# Altium PCB SmartSocket V1.0.PcbDoc (part 4 of 4)
Units mm, origin at the board's own origin, x right, y up, seen from the top; angles counter-clockwise.
Board outline 49.2 x 69.88 mm, 2 copper layers (Top Layer, Bottom Layer), stack 1.671 mm thick; 117 components, 80 nets, 371 pads, 48 vias.
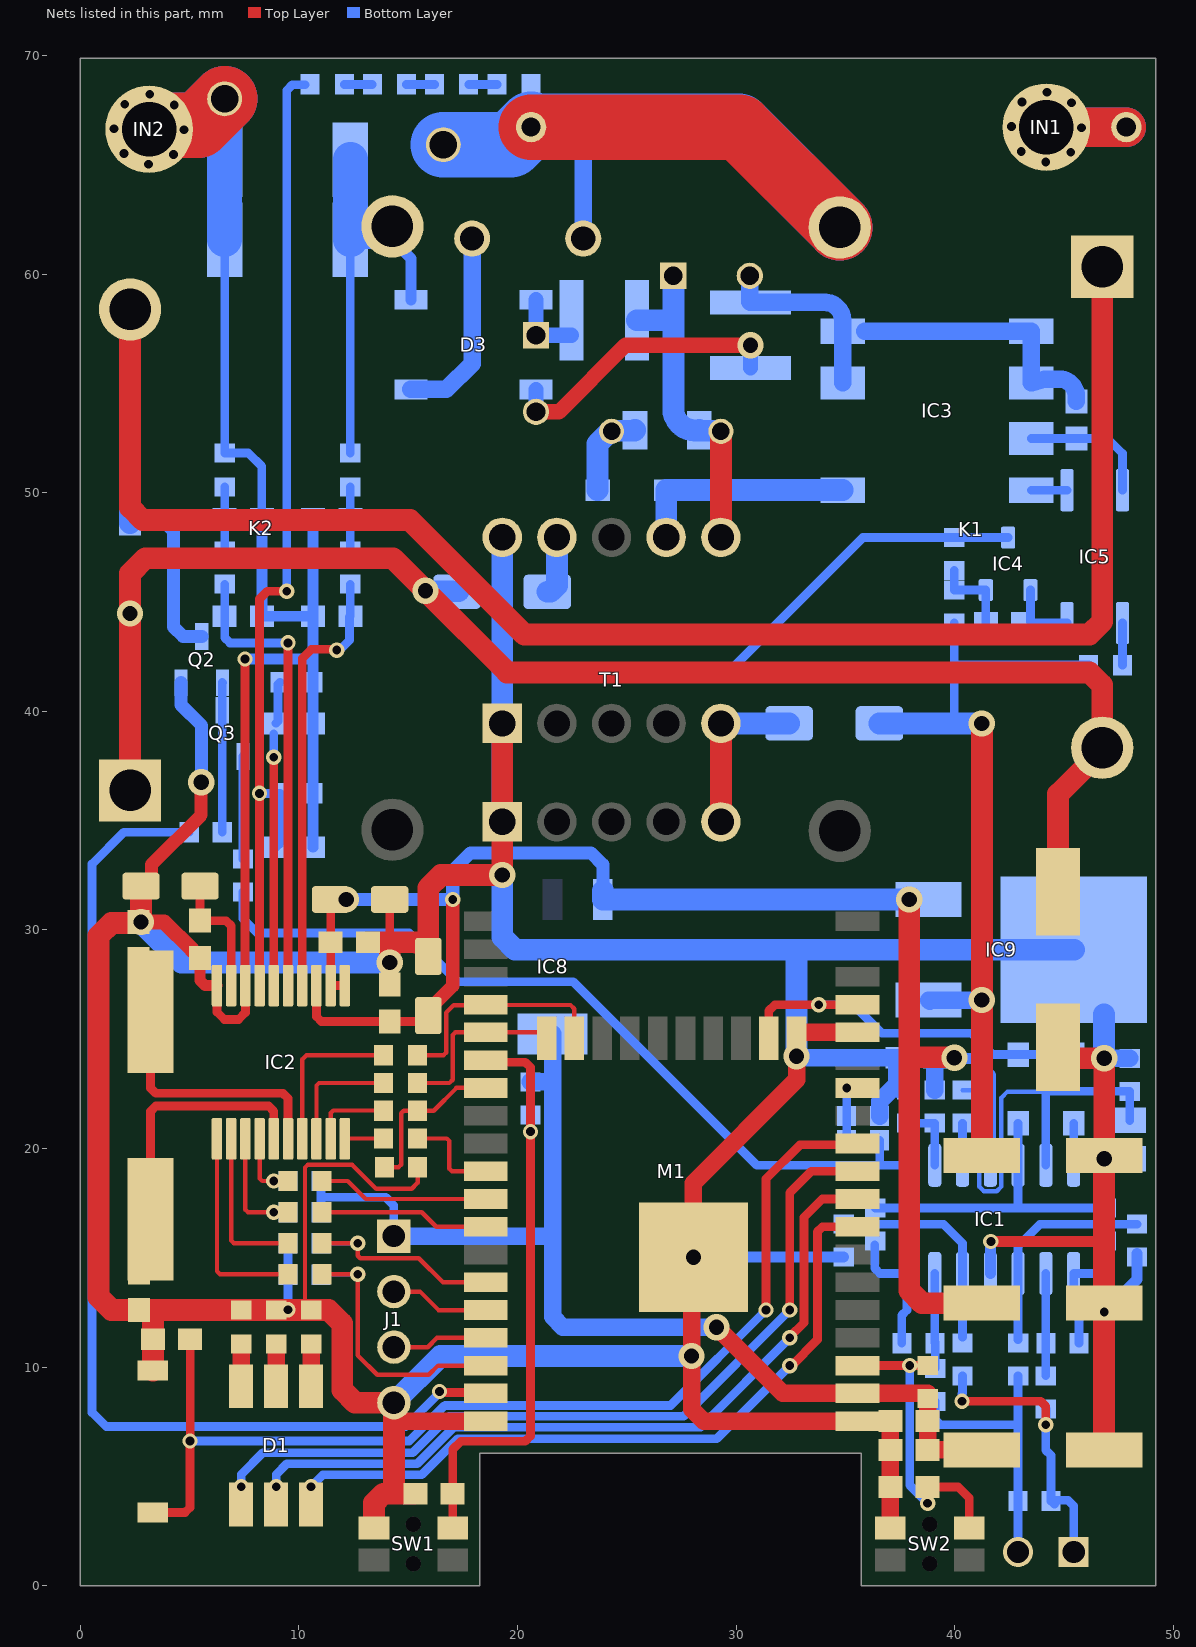
[diagram p2: the nets of this part, all layers, seen from the top]

## Via types
v1: diameter 0.7, hole 0.4, Top Layer to Bottom Layer, tented both sides, 30 vias
v2: diameter 1.2, hole 0.7, Top Layer to Bottom Layer, tented both sides, 18 vias

## Nets (pads, with @x,y where several pads share a name; then routed paths per layer and width w, separated by ;. In a path a pad name is that pad's centre, name@x,y a point inside that pad or via, vN(x,y) a via of type N, cw(c..) or ccw(c..) an arc to the next point about the centre after c; other vN are vias at no path point) (continued)
NetIC3_4: (continued)
  Bottom Layer w0.4: IC3.4@43.51,50.114 IC5.3@45.136,50.114
NetIC5_1: IC5.1 R27.1 | length 1.9
  Bottom Layer w0.4: R27.1@47.676,42.113 IC5.1@47.676,44.034
NetJ6_01: J6.01 R40.1 R43.1 R49.2 | length 13.3
  Top Layer w0.4: v1(40.335,8.443) 43.936,8.443 44.171,8.209 v1(44.171,7.366)
  Bottom Layer w0.4: v1@40.335,8.788 40.361,8.814 R40.1@40.361,9.608 ; v1(44.171,7.366) 44.171,6.202 44.411,5.962 R49.2@44.411,3.916 ; R43.1@44.171,8.098 44.183,8.086 v1@44.183,7.379 ; R49.2@44.563,3.733 R49.2@44.411,3.886 44.436,3.912 45.187,3.912 45.441,3.658 J6.01@45.441,1.549
NetJ6_02: J6.02 R35.1 R47.1 R49.1 | length 12.8
  Bottom Layer w0.4: R35.1@39.108,8.443 39.108,7.608 39.343,7.374 42.901,7.374 ; J6.02@42.901,1.549 R49.1@42.901,3.886 42.901,7.374 ; R47.1@42.901,9.608 42.901,7.374
NetQ2_1: Q2.1 Q3.3 R55.2 | length 6.9
  Bottom Layer w0.4: Q2.1@6.502,41.318 Q2.1@6.513,41.307 6.508,41.302 6.508,40.054 Q3.3@6.502,40.049 R55.2@6.502,34.468
NetQ3_1: Q3.1 R58.2 | length 4.7
  Bottom Layer w0.4: R58.2@7.452,33.242 Q3.1@7.452,37.929
NetR14_1: R14.1 R16.1 | length 1.3
  Bottom Layer w0.4: R14.1@14.928,68.671 R16.1@16.213,68.671
NetR14_2: R14.2 R15.1 | length 1.3
  Bottom Layer w0.4: R15.1@12.083,68.671 R14.2@13.368,68.671
NetR16_2: R16.2 R18.2 | length 1.3
  Bottom Layer w0.4: R16.2@17.773,68.671 R18.2@19.067,68.671
OFF_RELAY: IC1.1 R54.1 R58.1 | length 37.4
  Bottom Layer w0.4: R58.1@7.452,31.732 7.452,30.521 8.117,29.856 15.051,29.856 17.272,27.635 22.555,27.635 30.951,19.239 36.652,19.239 ; R54.1@36.569,20.382 36.569,19.322 36.652,19.239 ; IC1.1@37.821,19.239 36.652,19.239
POWER-300V: C4.1 D3.POS L1.1 | length 3.2
  Bottom Layer w0.7: D3.POS@20.853,58.819 C4.1@20.853,57.198 L1.1@22.478,57.198
POWER-300V-R: C3.1 C22.2 L1.2 R30.2 T1.6 | length 15.3
  Top Layer w1: T1.6@29.308,47.958 C22.2@29.308,52.807
  Bottom Layer w1: L1.2@25.478,57.884 27.132,57.884 ; C3.1@27.132,59.919 27.132,57.884 ; C22.2@29.308,52.807 29.282,52.832 28.343,52.832 R30.2@28.317,52.857 28.252,52.845 28.125,52.845 cw(c28.132,53.845) 27.132,53.845 27.132,57.884
POWER-GND: C4.2 D3.NEG L2.1 | length 13.1
  Top Layer w0.7: C4.2@20.853,53.698 21.897,53.698 24.943,56.744 v2(30.658,56.744)
  Bottom Layer w0.7: C4.2@20.853,53.698 D3.NEG@20.853,54.719 ; L2.1@30.658,55.698 v2(30.658,56.744)
POWER-GND-R: C2.2 C3.2 IC3.1 IC3.2 IC3.7 IC3.8 L2.2 | length 21.5
  Bottom Layer w0.8: C3.2@30.632,59.919 30.632,58.724 L2.2@30.658,58.698 34.074,58.698 cw(c34.074,57.898) 34.874,57.898 IC3.8@34.874,57.379 IC3.7@34.874,55.016 ; 35.89,57.379 IC3.1@43.51,57.379 IC3.2@43.51,55.016 44.126,55.194 44.768,55.194 cw(c44.768,54.394) 45.568,54.394 C2.2@45.568,54.176
POWER_L: C1.2 C5.2 C6.2 C7.2 C8.1 C9.1 C10.2 C11.1 C12.1 C13.1 C14.1 C15.1 C16.1 C17.2 C18.1 C19.1 C20.1 C21.1 C23.2 C24.1 C25.1 C26.1 C27.2 C28.1 C29.1 IC1.11 IC2.8 IC2.10 IC4.3 IC8.1 IC9.2 IN2.1 J1.04 M1.1 M1.15 M1.38 M1.39 Q2.2 Q3.2 R4.2 R5.2 R6.2 R7.1 R11.1 R13.1 R17.1 R23.1 R24.1 R25.1 R29.1 R38.1 R41.2 R45.1 R48.2 R56.1 R57.1 SW1.11 SW2.11 SW3.2 T1.1 T1.10 VR1.1 | length 359.7
  Top Layer w0.2: R6.2@10.566,12.626 10.287,12.905 10.287,19.136 10.404,19.253 12.446,19.253 13.538,18.161 15.164,18.161 15.436,18.433 R23.1@15.436,19.152
  Top Layer w0.4: C18.1@5.136,29.075 5.186,29.075 C18.1@5.486,28.775 ; IC2.10@6.26,27.457 6.26,26.25 6.602,25.908 7.246,25.908 7.56,26.222 IC2.8@7.56,27.457 7.539,27.478 v1@7.539,42.372 ; 14.16,29.909 C6.2@14.16,31.394
  Top Layer w0.5: C18.1@5.486,28.725 5.486,27.691 5.721,27.457 IC2.10@6.26,27.457 ; v1(41.656,15.748) 46.838,15.748
  Top Layer w0.6: C17.2@2.786,32.004 2.948,32.004 3.263,32.319 3.263,32.981 5.537,35.255 v2(5.537,36.754)
  Top Layer w0.7: v2(2.786,30.365) 3.847,30.365 C18.1@5.136,29.075
  Top Layer w0.8: 14.427,7.534 M1.38@18.551,7.534 ; M1.39@28.321,15.215 28.231,15.215 v2(28.051,15.034) ; M1.15@35.551,25.314 32.816,25.314 32.766,25.264 v2(32.766,24.219) 32.766,23.139 28.051,18.424 v2(28.051,15.034) ; SW2.11@37.062,2.641 C24.1@37.062,4.521 C28.1@37.062,6.223 C25.1@37.062,7.534 M1.1@35.551,7.534 28.52,7.534 27.965,8.089 v2(27.965,10.516) 27.965,14.949 v2(28.051,15.034)
  Top Layer w1: C13.1@2.667,30.315 1.436,30.315 0.85,29.729 0.85,13.211 1.436,12.626 C10.2@2.692,12.626 3.48,12.626 ; v2(2.786,30.365) C17.2@2.786,32.004 ; SW3.2@3.327,9.854 C29.1@3.327,11.278 3.327,12.473 3.48,12.626 ; C8.1@13.16,29.439 15.274,29.439 cw(c15.274,28.787) 15.604,29.349 cw(c15.274,28.787) C27.2@15.836,29.117 ; SW1.11@13.44,2.641 13.44,3.788 13.868,4.216 14.351,4.216 ; v2(14.16,28.509) 14.16,29.289 ; C21.1@15.254,4.216 14.351,4.216 ; C27.2@15.926,29.349 15.926,31.926 16.512,32.512 v2(19.308,32.512) T1.1@19.308,34.948 T1.1@19.308,39.448 ; C23.2@44.729,24.644 44.729,24.63 45.229,24.13 v2(46.844,24.13) ; C7.2@46.838,6.223 v1(46.838,12.522) C5.2@46.838,12.929 46.838,15.748 C1.2@46.838,19.685 ; C1.2@46.844,19.685 v2@46.844,24.076 ; 3.48,12.626 R4.2@7.366,12.626 R5.2@8.966,12.626 v1(9.51,12.626) R6.2@10.566,12.626 11.356,12.626 11.989,11.992 11.989,8.964 12.575,8.378 J1.04@14.351,8.378 14.351,4.216
  Top Layer w3: IN2.1@3.156,66.62 3.347,66.811 5.41,66.811 VR1.1@6.612,68.013
  Bottom Layer w0.4: R7.1@6.612,61.57 R11.1@6.612,51.816 7.696,51.816 8.312,51.201 C14.1@8.312,48.793 ; v1@9.51,12.893 R24.1@9.51,15.672 ; 19.308,41.859 29.718,41.859 35.803,47.944 R29.1@39.98,47.944 IC4.3@42.443,47.944 ; v2(32.766,24.219) 32.766,24.181 v2@32.791,24.155
  Bottom Layer w0.5: v1(7.539,42.393) 10.658,42.393 ; C14.1@8.312,48.793 C15.1@8.312,44.348 C12.1@10.658,44.348 ; C19.1@10.658,33.782 R17.1@10.658,36.246 C16.1@10.658,39.448 R13.1@10.658,41.326 10.658,42.393 ; C11.1@10.658,48.793 C12.1@10.658,44.348 ; v2@28.051,15.215 28.24,15.215 28.421,15.034 R41.2@34.925,15.034 ; IC1.11@41.631,14.289 41.643,14.302 41.643,15.735 v1(41.656,15.748) ; v1(46.838,12.522) 48.336,14.021 R48.2@48.336,15.034 R48.2@48.336,15.203 ; 10.658,42.393 C12.1@10.658,44.348
  Bottom Layer w0.6: Q2.2@4.613,41.307 4.613,40.295 5.552,39.355 Q3.2@5.552,37.929 5.552,36.769 v2(5.537,36.754)
  Bottom Layer w0.8: v2@32.791,24.155 C26.1@37.341,24.155 ; R56.1@36.569,21.488 36.569,22.167 37.167,22.765 37.341,22.765 ; C26.1@37.391,24.155 C26.1@37.341,24.155 ; R38.1@37.821,22.673 37.786,22.708 37.451,22.708 37.394,22.765 37.341,22.765 ; v2(46.844,24.13) R45.1@48.006,24.13 ; 37.341,22.765 C26.1@37.341,24.155
  Bottom Layer w1: v2(2.786,30.365) 4.642,28.509 v2(14.16,28.509) ; J1.04@14.351,8.378 16.488,10.516 v2(27.965,10.516) ; v2(19.308,32.512) 19.308,29.68 19.894,29.094 32.766,29.094 ; T1.1@19.308,34.948 T1.1@19.308,39.448 19.308,41.859 T1.10@19.308,47.958 ; v2(32.766,24.219) 32.766,29.094 ; IC9.2@45.453,29.094 32.766,29.094 ; v2@46.838,24.136 IC9.2@46.838,26.144 ; v2(46.844,19.54) C20.1@48.006,19.54
  Bottom Layer w1.6: R7.1@6.612,61.57 R57.1@6.612,65.186 ; R57.1@6.612,65.23 VR1.1@6.612,67.581
  Bottom Layer w3: IN2.1@3.156,66.62 3.347,66.811 5.41,66.811 VR1.1@6.612,68.013
POWER_N: F1.2 F2.1 K1.4 R18.1 VR1.2 | length 41.7
  Top Layer w3: F1.2@20.627,66.718 30.158,66.718 K1.4@34.747,62.128
  Bottom Layer w0.8: F2.1@23.012,61.62 23.012,66.751
  Bottom Layer w1: 23.012,66.751 23.114,66.853
  Bottom Layer w3: VR1.2@16.612,65.913 19.687,65.913 F1.2@20.627,66.853 ; F1.2@20.66,66.751 23.012,66.751 30.124,66.751 K1.4@34.747,62.128
RELAY: M1.37 R55.1 | length 49.1
  Top Layer w0.4: v1(16.442,8.889) 16.484,8.847 18.509,8.847 M1.37@18.551,8.804
  Bottom Layer w0.4: R55.1@4.992,34.468 1.998,34.468 0.55,33.02 0.55,7.934 1.194,7.29 14.884,7.29 16.442,8.847 v1(16.442,8.889)
RXD0: J1.02 M1.34 | length 4.5
  Top Layer w0.2: J1.02@14.351,13.458 15.548,13.458 16.392,12.614 M1.34@18.551,12.614
TXD0: J1.03 M1.35 | length 4.4
  Top Layer w0.2: J1.03@14.351,10.918 15.897,10.918 16.323,11.344 M1.35@18.551,11.344
pads on no net: IC8.2 K1.3 K2.4 M1.4 M1.5 M1.6 M1.7 M1.12 M1.14 M1.17 M1.18 M1.19 M1.20 M1.21 M1.22 M1.27 M1.28 M1.32 SW1. SW1.21 SW1.22 SW2. SW2.21 SW2.22 T1.2 T1.3 T1.4 T1.8

## Keep-outs
Keep-Out Layer:
  the board outline again, w0.5

## Silkscreen, mask and mechanical layers (free items; w line width, h text height)
Top Overlay:
  circle w0.1: c14.286,34.579 r2.5
  circle w0.1: c34.747,34.528 r2.5
  text "Design By TVBac" at 1.27,1.458 h1
  text "Smart Sensor" at 1.27,0.519 h1
Bottom Overlay:
  text "Design By TVBac" at 8.128,1.458 h1
  text "Smart Sensor" at 8.128,0.519 h1

## Text inside footprints (layer, text, board x,y; h text height)
M1: Mechanical 13 "ANTENNA" at 30.751,3.894 h1.27 r180